# Altium PCB GPSR_v3.PcbDoc (part 2 of 2)
Units mil, origin at the board's own origin, x right, y up, seen from the top; angles counter-clockwise.
Board outline 2716.54 x 2700.39 mil, 4 copper layers (Top, GND2, VCC3, Bottom), stack 30.8 mil thick; 185 components, 126 nets, 538 pads, 295 vias.
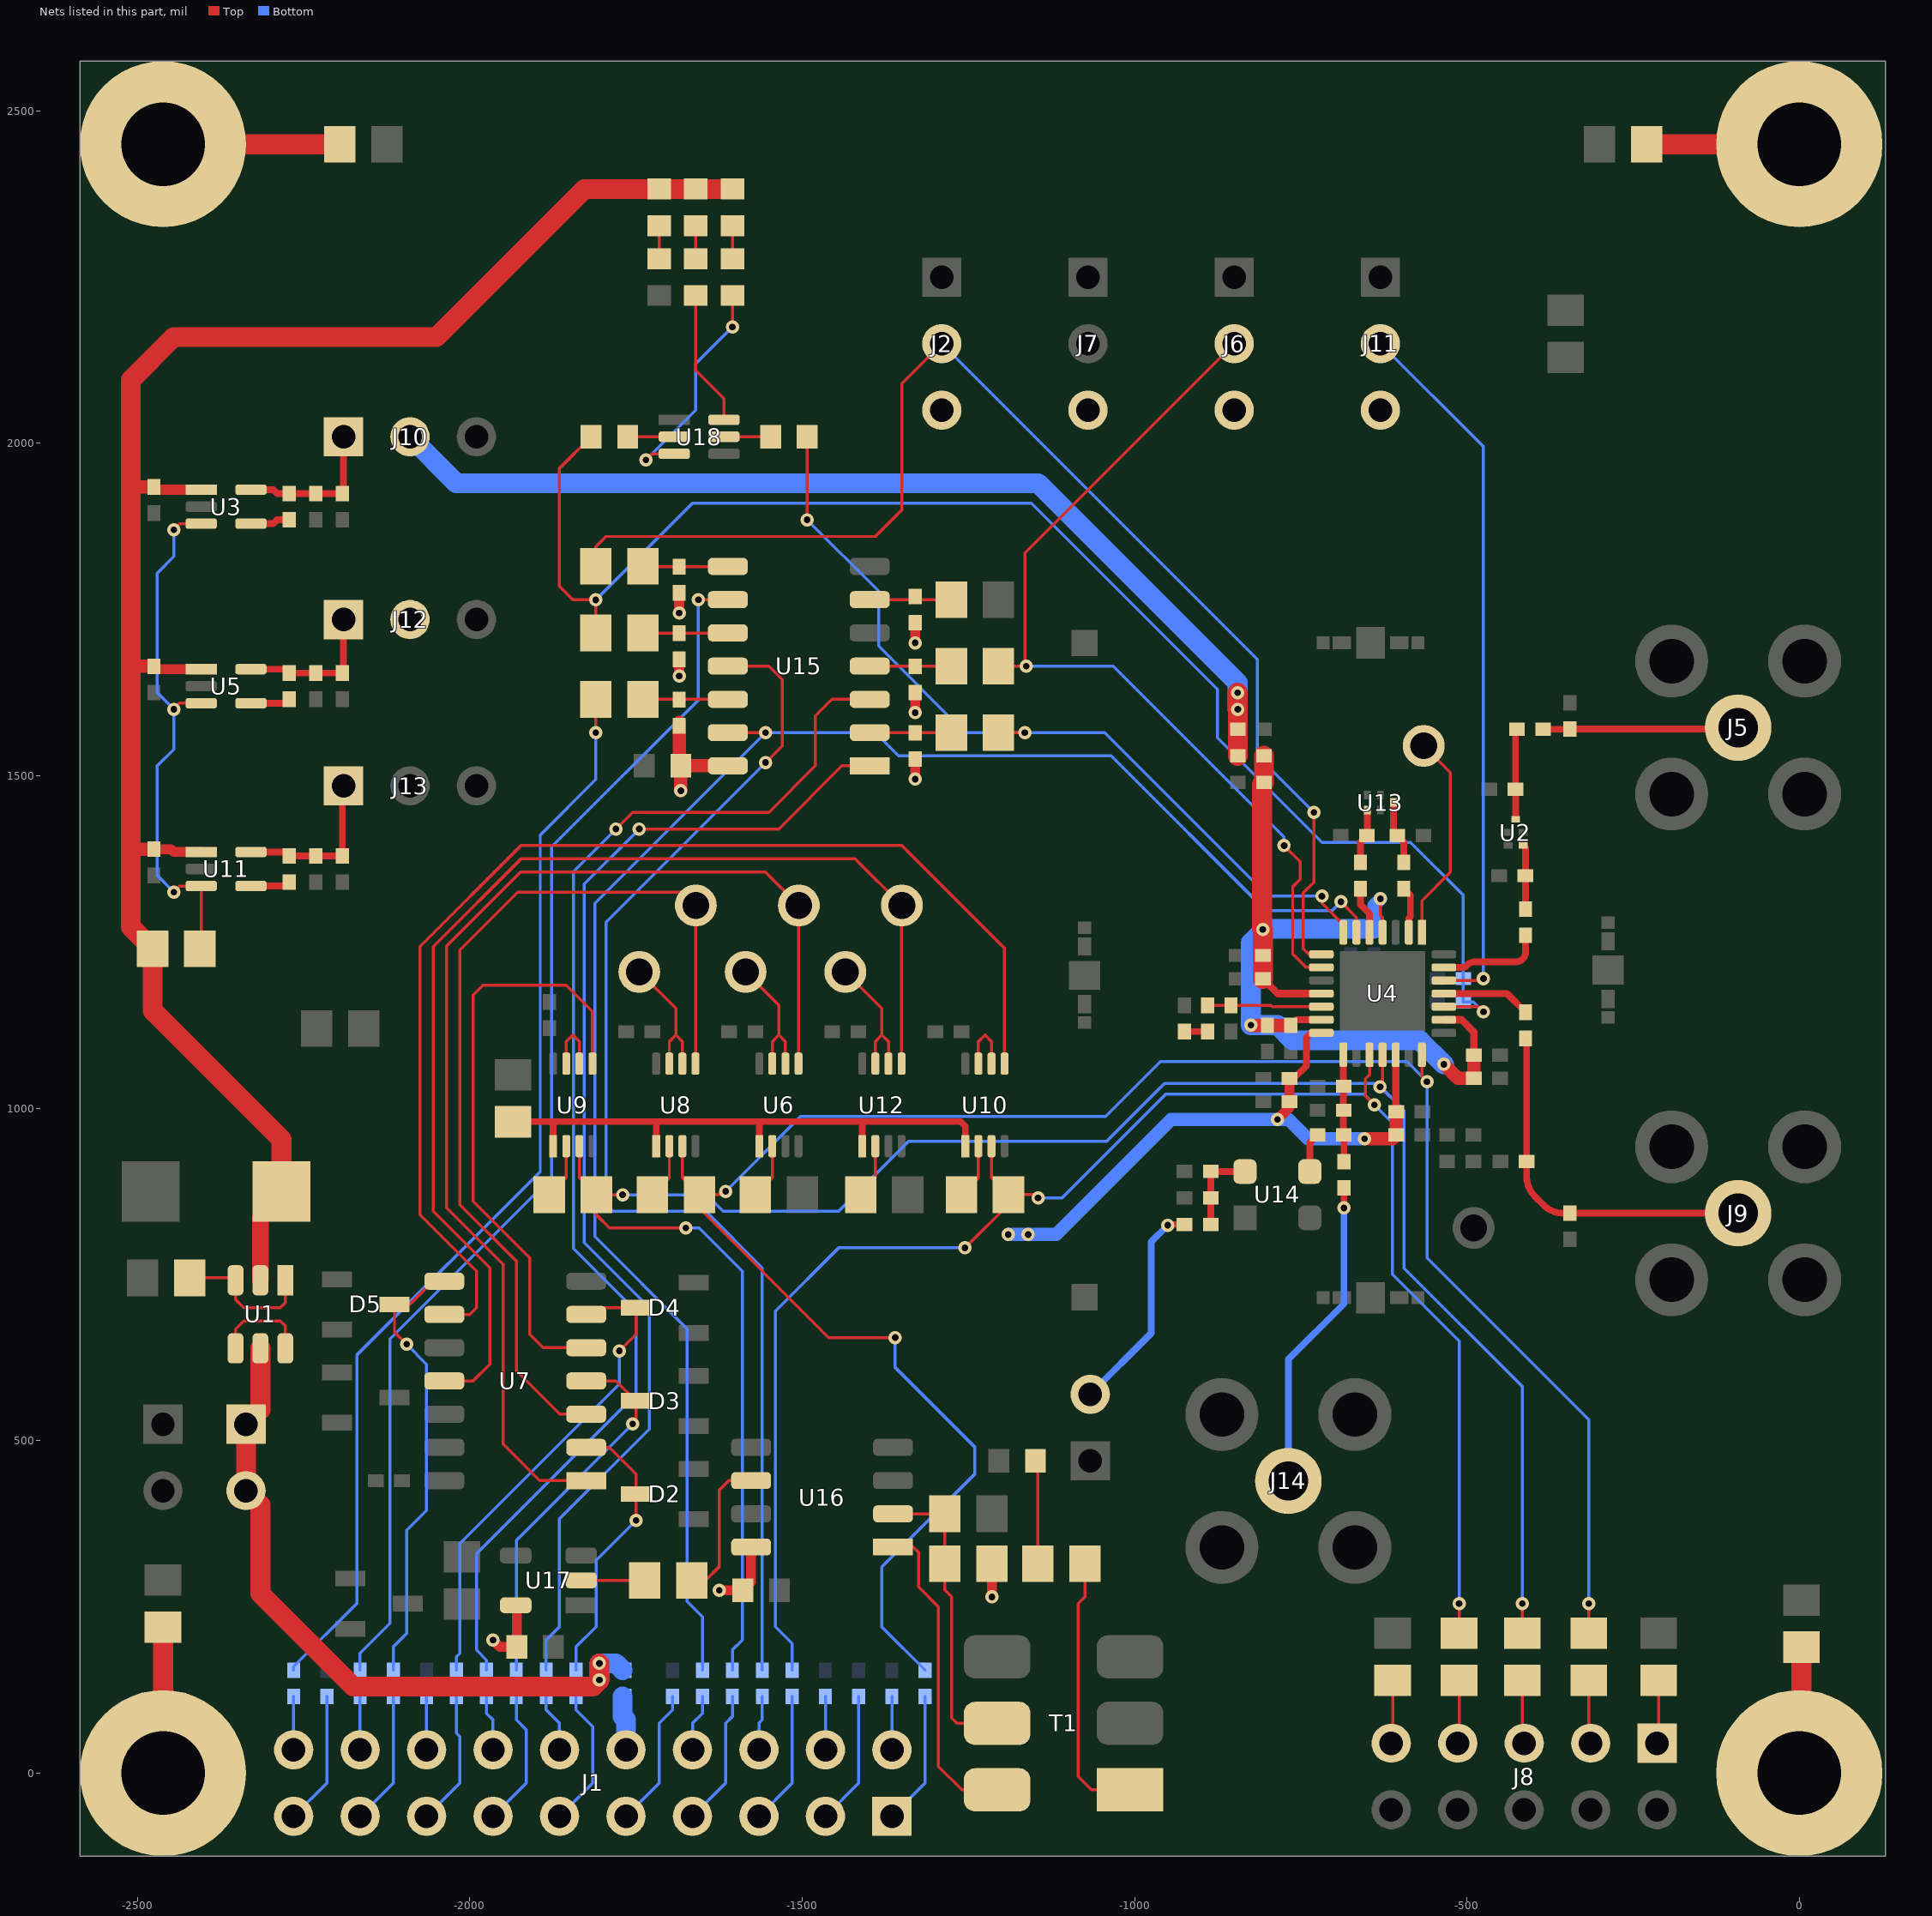
[diagram p4: the nets of this part, all layers, seen from the top]

## Via types
v1: diameter 20, hole 10, Top to Bottom, tented both sides, 295 vias

## Nets (pads, with @x,y where several pads share a name; then routed paths per layer and width w, separated by ;. In a path a pad name is that pad's centre, name@x,y a point inside that pad or via, vN(x,y) a via of type N, cw(c..) or ccw(c..) an arc to the next point about the centre after c; other vN are vias at no path point) (continued)
I0_BUF: D2.1 FB12.2 U7.2 | length 424
  Top w4.5: U7.2@-1824.84,489.8 -1789.8,489.8 -1749.92,449.92 D2.1@-1749.92,419.8 v1(-1749.92,380.08)
  Bottom w4.5: FB12.2@-1840,154.69 -1840,190.01 -1810,220.01 -1810,320 v1(-1749.92,380.08)
I1: FB2.2 R7.1 R41.1 U4.21 U8.3 | length 3278
  Top w4.5: U8.3@-1680.16,942.99 -1680.16,895.59 R41.1@-1654.57,870 ; v1(-1615,875) -1620,870 R41.1@-1654.57,870 ; v1(-1360,655) -1460,655 -1654.57,849.57 R41.1@-1654.57,870 ; U4.21@-567.72,1080.31 -567.71,1047.71 v1(-560,1040) ; R7.1@-316.61,210.24 v1(-316.61,255)
  Bottom w4.5: v1(-1615,875) -1502.5,987.5 -1043.5,987.5 -961,1070 -590,1070 v1(-560,1040) -560,775 -316.61,531.61 v1(-316.61,255) ; v1(-1360,655) -1360,610 -1240,490 -1240,450 -1380,310 -1380,219.69 FB2.2@-1315,154.69
I1_BUF: D3.1 FB14.2 U7.4 | length 567
  Top w4.5: U7.4@-1824.84,589.8 -1779.92,589.8 D3.1@-1749.92,559.8 -1749.92,530.08 v1(-1755,525)
  Bottom w4.5: FB14.2@-1930,154.69 -1930,350 v1(-1755,525)
IDLE_B: C41.2 C42.2 R24.1 R33.1 U4.24 | length 2269.3
  Top w4.5: R33.1@-1817.56,2010 -1865,1962.56 -1865,1785 -1844.57,1764.57 v1(-1810.43,1764.57) R24.1@-1810.43,1715 ; U4.24@-534.65,1152.76 -482.76,1152.76 v1(-475,1145)
  Bottom w4.5: v1(-1810.43,1764.57) -1665,1910 -1155,1910 -875,1630 -875,1557 -718,1400 -585,1400 -505.31,1320.31 C42.2@-505.31,1195 C41.2@-505.31,1160 -490,1160 v1(-475,1145)
IDLE_B_IN: FB5.1 U15.11 | length 1869.5
  Top w4.5: U15.11@-1611.77,1665 -1550,1665 -1530,1645 -1530,1545 v1(-1555,1520)
  Bottom w4.5: FB5.1@-1560,154.69 -1560,760 -1645,845 -1785,845 -1795,855 -1795,1280 v1(-1555,1520)
IN+: T1.6 U16.1 | length 478.9
  Top w4.5: U16.1@-1363.23,340 -1333,340 -1325,332 -1325,280 -1295,250 -1295,10 -1259.8,-25.2 T1.6@-1206.61,-25.2
LD: FB7.1 U4.6 U15.13 | length 2678.4
  Top w4.5: U15.13@-1611.77,1565 v1(-1555,1565) ; v1(-689.5,1310.5) -666.14,1287.14 U4.6@-666.14,1264.57
  Bottom w4.5: FB7.1@-1650,154.69 -1650,235 -1673,258 -1673,668 -1812,807 -1812,1308 v1(-1555,1565) -1390,1565 -1355,1530 -1035,1530 -801.95,1296.95 -703.05,1296.95 v1(-689.5,1310.5)
LD_BUF: FB19.1 R25.1 | length 1648.6
  Top w4.5: v1(-1810.43,1565) R25.1@-1810.43,1615
  Bottom w4.5: FB19.1@-2265,154.69 -2265,160 -2170,255 -2170,628.62 -1894,904.62 -1894,1410.99 -1810.43,1494.56 v1(-1810.43,1565)
NETC2_1: C2.1 J5.1 L3.2 | length 294.4
  Top w10: C2.1@-385.32,1570 -345.31,1570 L3.2@-345,1570.31 -94.02,1570.31 J5.1@-91.89,1572.44
NETC2_2: C2.2 L1.1 U2.1 | length 136.6
  Top w10: U2.1@-426.61,1434.49 -426.61,1479.49 L1.1@-426.93,1479.8 -426.93,1567.76 C2.2@-424.69,1570
NETC3_2: C3.2 C4.2 J9.1 L4.2 | length 556.2
  Top w10: C4.2@-411.61,1105.12 -410.31,1103.81 L4.2@-410.31,920 -410.31,897.89 ccw(c-367.12,897.89) -397.66,867.35 -384.29,853.98 ccw(c-355.66,882.61) -355.66,842.12 C3.2@-345,842.12 J9.1@-91.89,842.12
NETC4_1: C4.1 U4.25 | length 134.6
  Top w10: U4.25@-534.65,1172.44 -439.57,1172.44 C4.1@-411.61,1144.49
NETC5_1: C5.1 U4.27 | length 159.2
  Top w4.5: -501.01,1214.01 -499.01,1216.01
  Top w10: U4.27@-534.65,1211.81 -506.29,1211.81 ccw(c-506.29,1219.29) -501.24,1213.77 ccw(c-506.29,1219.29) -501,1214 ; -499,1216 cw(c-489.34,1206.34) -489.34,1220 -426.61,1220 ccw(c-426.61,1235) -411.61,1235 C5.1@-411.61,1260.12
NETC5_2: C5.2 L2.1 U2.4 | length 97.2
  Top w10: U2.4@-415.3,1395.12 -411.93,1391.75 L2.1@-411.93,1349.8 -411.61,1349.49 C5.2@-411.61,1299.49
NETC7_1: C7.1 U3.4 | length 60
  Top w10: U3.4@-2329.21,1879.21 -2295.79,1879.21 -2289.88,1885.12 C7.1@-2271.61,1885.12
NETC7_2: C7.2 C8.2 C9.2 J10.1 U3.5 | length 226.2
  Top w10: U3.5@-2329.21,1930.39 -2295.39,1930.39 -2289.49,1924.49 C7.2@-2271.61,1924.49 C8.2@-2231.61,1924.49 C9.2@-2191.61,1924.49 -2190,1926.1 J10.1@-2190,2010
NETC10_2: C10.2 FB21.1 J10.2 | length 1533.5
  Top w30: v1(-845,1625) -845,1600.31 v1(-844.69,1600) C10.2@-844.69,1570 FB21.1@-844.69,1530
  Bottom w30: J10.2@-2090,2010 -2020,1940 -1145,1940 -845,1640 v1(-845,1625) -845,1600.31 v1(-844.69,1600)
NETC12_1: C12.1 L5.1 U13.1 | length 96.7
  Top w10: U13.1@-610.32,1460 -610.32,1415.63 C12.1@-604.69,1410 -595,1400.32 L5.1@-595,1369.69
NETC14_1: C14.1 U5.4 | length 60
  Top w10: U5.4@-2329.21,1609.21 -2277.52,1609.21 C14.1@-2271.61,1615.12
NETC14_2: C14.2 C15.2 C16.2 J12.1 U5.5 | length 221.2
  Top w10: U5.5@-2329.21,1660.39 -2277.51,1660.39 C14.2@-2271.61,1654.49 C15.2@-2231.61,1654.49 C16.2@-2191.61,1654.49 -2190,1656.1 J12.1@-2190,1735
NETC18_1: C18.1 U11.4 | length 60
  Top w10: U11.4@-2329.21,1334.21 -2277.52,1334.21 C18.1@-2271.61,1340.12
NETC18_2: C18.2 C19.2 C20.2 J13.1 U11.5 | length 246.2
  Top w10: U11.5@-2329.21,1385.39 -2277.51,1385.39 C18.2@-2271.61,1379.49 C19.2@-2231.61,1379.49 C20.2@-2191.61,1379.49 -2191.61,1483.39 J13.1@-2190,1485
NETC21_1: C21.1 L6.1 U13.4 | length 83.3
  Top w10: L6.1@-660,1369.69 -660,1400.32 C21.1@-650.32,1410 -649.69,1410.63 U13.4@-649.69,1448.68
NETC22_1: C22.1 C23.1 C54.2 R45.2 U4.15 | length 161
  Top w10: U4.15@-685.83,1080.31 -685.83,960.51 C23.1@-685.32,960 -685,959.68 C22.1@-685,919.69
NETC22_2: C22.2 J14.1 | length 475.5
  Top w10: v1(-685,850) C22.2@-685,880.31
  Bottom w10: J14.1@-768.5,439.37 -768.5,622.5 -685,706 v1(-685,850)
NETC23_2: C23.2 U14.3 | length 59.9
  Top w10: U14.3@-736.18,904.84 -736.18,948.5 C23.2@-724.69,960
NETC24_2: C24.2 C25.2 R12.1 U14.4 | length 131.6
  Top w10: R12.1@-885.32,825 C24.2@-885.31,865 C25.2@-885.31,905 -885.16,904.84 U14.4@-833.82,904.84
NETC26_2: C26.2 R11.1 | length 35
  Top w10: C26.2@-925,1115.31 R11.1@-890,1115.32
NETC27_2: C27.2 R11.2 U4.12 | length 171.9
  Top w4.5: R11.2@-890,1154.69 C27.2@-855,1154.69 -794.68,1154.69 -792.75,1152.76 U4.12@-718.9,1152.76
NETC47_2: C47.2 R29.1 | length 156.3
  Top w4.5: C47.2@-1149.06,469.8 -1145.43,466.18 R29.1@-1145.43,315
NETD1_1: D1.1 R2.2 | length 49.9
  Top w4.5: D1.1@-1715,2277.56 R2.2@-1715,2327.44
NETD8_1: D8.1 R31.1 | length 49.9
  Top w4.5: D8.1@-1660,2277.56 R31.1@-1660,2327.44
NETD8_2: D8.2 U18.6 | length 204.4
  Top w4.5: D8.2@-1660,2222.44 -1660,2110 -1617.6,2067.6 U18.6@-1617.6,2035.59
NETD9_1: D9.1 R32.1 | length 49.9
  Top w4.5: D9.1@-1605,2277.56 R32.1@-1605,2327.44
NETD9_2: D9.2 U18.3 | length 347.8
  Top w4.5: v1(-1735,1975) -1725.59,1984.41 U18.3@-1692.4,1984.41 ; v1(-1605,2175) D9.2@-1605,2222.44
  Bottom w4.5: v1(-1735,1975) -1660,2050 -1660,2120 v1(-1605,2175)
NETFB1_2: FB1.2 J1.2 | length 80.3
  Bottom w4.5: FB1.2@-1365,115.31 -1365,35.08 J1.2@-1364.96,35.04
NETFB2_1: FB2.1 J1.1 | length 201
  Bottom w4.5: J1.1@-1364.96,-64.96 -1315,-15 FB2.1@-1315,115.32
NETFB3_2: FB3.2 J1.4 | length 80.3
  Bottom w4.5: FB3.2@-1465,115.31 -1465,35.08 J1.4@-1464.96,35.04
NETFB4_1: FB4.1 J1.3 | length 201
  Bottom w4.5: J1.3@-1464.96,-64.96 -1415,-15 FB4.1@-1415,115.32
NETFB5_2: FB5.2 J1.6 | length 82.4
  Bottom w4.5: J1.6@-1564.96,35.04 -1565,35.08 -1565,75 -1560,80 FB5.2@-1560,115.31
NETFB6_1: FB6.1 J1.5 | length 201
  Bottom w4.5: J1.5@-1564.96,-64.96 -1515,-15 FB6.1@-1515,115.32
NETFB7_2: FB7.2 J1.8 | length 86.5
  Bottom w4.5: J1.8@-1664.96,35.04 -1664.96,75.04 -1650,90 FB7.2@-1650,115.31
NETFB8_1: FB8.1 J1.7 | length 205.1
  Bottom w4.5: J1.7@-1664.96,-64.96 -1615,-15 -1615,75 -1605,85 FB8.1@-1605,115.32
NETFB9_2: FB9.2 J1.10 | length 82.4
  Bottom w30: FB9.2@-1770,115.31 -1770,85 -1764.96,79.96 J1.10@-1764.96,35.04
NETFB10_1: FB10.1 J1.9 | length 209.3
  Bottom w4.5: J1.9@-1764.96,-64.96 -1715,-15 -1715,75 -1695,95 FB10.1@-1695,115.32
NETFB11_2: FB11.2 J1.12 | length 88.6
  Bottom w4.5: FB11.2@-1885,115.31 -1885,94.99 -1865,74.99 -1865,35.08 J1.12@-1864.96,35.04
NETFB12_1: FB12.1 J1.11 | length 211.3
  Bottom w4.5: J1.11@-1864.96,-64.96 -1815,-15 -1815,70 -1840,95 FB12.1@-1840,115.32
NETFB13_2: FB13.2 J1.14 | length 84.4
  Bottom w4.5: FB13.2@-1975,115.31 -1975,90 -1965,80 -1965,35.08 J1.14@-1964.96,35.04
NETFB14_1: FB14.1 J1.13 | length 207.2
  Bottom w4.5: J1.13@-1964.96,-64.96 -1915,-15 -1915,65 -1930,80 FB14.1@-1930,115.32
NETFB15_2: FB15.2 J1.16 | length 80.3
  Bottom w4.5: FB15.2@-2065,115.31 -2065,35.08 J1.16@-2064.96,35.04
NETFB16_1: FB16.1 J1.15 | length 203
  Bottom w4.5: J1.15@-2064.96,-64.96 -2015,-15 -2015,55 -2020,60 FB16.1@-2020,115.32
NETFB17_2: FB17.2 J1.18 | length 80.3
  Bottom w4.5: FB17.2@-2165,115.31 -2165,35.08 J1.18@-2164.96,35.04
NETFB18_1: FB18.1 J1.17 | length 201
  Bottom w4.5: J1.17@-2164.96,-64.96 -2115,-15 FB18.1@-2115,115.32
NETFB19_2: FB19.2 J1.20 | length 80.3
  Bottom w4.5: FB19.2@-2265,115.31 -2265,35.08 J1.20@-2264.96,35.04
NETFB20_1: FB20.1 J1.19 | length 201
  Bottom w4.5: J1.19@-2264.96,-64.96 -2215,-15 FB20.1@-2215,115.32
NETJ8_1: J8.1 R6.2 | length 95.4
  Top w4.5: J8.1@-213.78,44.88 -211.61,47.05 R6.2@-211.61,139.37
NETJ8_3: J8.3 R7.2 | length 95.7
  Top w4.5: R7.2@-316.61,139.37 -316.61,47.71 J8.3@-313.78,44.88
NETJ8_5: J8.5 R8.2 | length 95.7
  Top w4.5: R8.2@-416.61,139.37 -416.61,47.71 J8.5@-413.78,44.88
NETJ8_7: J8.7 R9.2 | length 95.4
  Top w4.5: J8.7@-513.78,44.88 -511.61,47.05 R9.2@-511.61,139.37
NETJ8_9: J8.9 R10.2 | length 95.4
  Top w4.5: J8.9@-613.78,44.88 -611.61,47.05 R10.2@-611.61,139.37
NETJ15_2: J15.2 R12.2 | length 328.2
  Top w10: v1(-950,824) -949,825 R12.2@-924.69,825
  Bottom w10: J15.2@-1066.61,569.8 -974.89,661.52 -974.89,799.11 v1(-950,824)
NETL5_2: L5.2 U4.2 | length 70.9
  Top w10: L5.2@-595,1330.31 -585,1320.32 -585,1288 -587.4,1285.6 U4.2@-587.4,1264.57
NETL6_2: L6.2 U4.5 | length 71.4
  Top w10: L6.2@-660,1330.31 -660,1306 -646.46,1292.46 U4.5@-646.46,1264.57
NETMH1_1: MH1.1 R36.1 | length 190.8
  Top w30: MH1.1@0,0 3.39,3.39 R36.1@3.39,189.37
NETMH2_1: MH2.1 R37.1 | length 219.4
  Top w30: R37.1@-2461.61,219.37 -2461.42,219.18 MH2.1@-2461.42,0
NETMH3_1: MH3.1 R38.1 | length 229.6
  Top w30: R38.1@-229.57,2450 MH3.1@0,2450
NETMH4_1: MH4.1 R39.1 | length 266
  Top w30: MH4.1@-2461.42,2450 R39.1@-2195.43,2450
NETR4_2: R4.2 U1.1 U1.3 | length 215.8
  Top w4.5: R4.2@-2421.18,744.8 U1.3@-2356.02,744.8 ; U1.3@-2352.4,741.18 -2352.4,712.4 -2349.3,709.3 -2343.1,703.1 -2340,700 -2285,700 -2277.6,707.4 U1.1@-2277.6,741.18
  Top w10: U1.3@-2356.02,744.8 U1.3@-2352.4,741.18
NETR5_1: R5.1 U3.3 U5.3 U11.3 | length 818.3
  Top w4.5: v1(-2445,1325) -2445,1326.21 -2437,1334.21 U11.3@-2404.02,1334.21 R5.1@-2404.01,1241.97 ; v1(-2445,1600) -2445,1601.21 -2437,1609.21 U5.3@-2404.02,1609.21 ; v1(-2445,1870) -2445,1871.21 -2437,1879.21 U3.3@-2404.02,1879.21
  Top w10: R5.1@-2406.18,1239.8 R5.1@-2404.01,1241.97
  Bottom w4.5: v1(-2445,1325) -2470,1350 -2470,1515 -2445,1540 v1(-2445,1600) -2470,1625 -2470,1805 -2445,1830 v1(-2445,1870)
NETR14_1: R14.1 R25.2 U15.12 | length 128.1
  Top w4.5: R25.2@-1739.57,1615 -1685.32,1615 R14.1@-1685,1614.69 -1684.68,1615 U15.12@-1611.77,1615
NETR15_1: R15.1 R24.2 U15.10 | length 128.1
  Top w4.5: R24.2@-1739.57,1715 -1739.25,1714.68 R15.1@-1685,1714.69 -1612.09,1714.68 U15.10@-1611.77,1715
NETR16_1: R16.1 R23.2 U15.8 | length 128.1
  Top w4.5: R23.2@-1739.57,1815 -1739.25,1814.68 R16.1@-1685,1814.69 -1612.09,1814.68 U15.8@-1611.77,1815
NETR17_1: R17.1 R22.2 U15.6 | length 123.1
  Top w4.5: U15.6@-1398.23,1765 -1330.32,1765 -1330,1764.68 -1275.75,1764.68 R22.2@-1275.43,1765
NETR18_1: R18.1 R21.2 U15.4 | length 123.1
  Top w4.5: U15.4@-1398.23,1665 -1330.32,1665 R18.1@-1330,1664.69 -1329.68,1665 R21.2@-1275.43,1665
NETR19_1: R19.1 R20.2 U15.2 | length 123.1
  Top w4.5: U15.2@-1398.23,1565 -1330.32,1565 R19.1@-1330,1564.69 -1329.68,1565 R20.2@-1275.43,1565
NETR26_1: R26.1 R30.2 T1.5 U16.2 | length 461
  Top w4.5: U16.2@-1363.23,390 R30.2@-1285.43,390 R26.1@-1285.43,315 -1285.43,275.44 -1275,265.01 -1275,82.8 -1267,74.8 T1.5@-1206.61,74.8
NETR27_1: R27.1 U17.2 | length 95.4
  Top w4.5: U17.2@-1832.4,289.8 R27.1@-1737.05,289.8
NETR27_2: R27.2 U16.6 | length 219
  Top w4.5: R27.2@-1666.18,289.8 -1645.2,289.8 -1625,310 -1625,425 -1610.2,439.8 -1588.38,439.8 -1588.18,440 U16.6@-1576.77,440
NETR29_2: R29.2 T1.1 | length 411.1
  Top w4.5: R29.2@-1074.57,315 -1074.57,265.44 -1085,255.01 -1085,-5.01 -1064.81,-25.2 T1.1@-1006.61,-25.2
NETR33_2: R33.2 U18.2 | length 70
  Top w4.5: R33.2@-1762.44,2010 U18.2@-1692.4,2010
NETR34_2: R34.2 U18.5 | length 70
  Top w4.5: U18.5@-1617.6,2010 R34.2@-1547.56,2010
NETR35_1: R35.1 U6.1 U8.1 U9.1 U10.1 U12.1 | length 864.4
  Top w10: R35.1@-1935,979.57 -1934.57,980 -1880,980 ; U9.1@-1874.53,942.99 -1874.53,974.53 -1880,980 ; U8.1@-1719.53,942.99 -1719.53,979.53 -1720,980 ; U6.1@-1564.53,942.99 -1564.53,979.53 -1565,980 ; U12.1@-1409.53,942.99 -1409.53,979.53 -1410,980 ; U10.1@-1254.53,942.99 -1254.53,972.92 -1261.61,980 -1410,980 ; -1880,980 -1720,980 ; -1720,980 -1565,980 ; -1565,980 -1410,980
NETR40_2: R40.2 U6.2 | length 83.6
  Top w4.5: R40.2@-1570.43,870 -1544.84,895.59 U6.2@-1544.84,942.99
NETR41_2: R41.2 U8.2 | length 83.6
  Top w4.5: R41.2@-1725.43,870 -1699.84,895.59 U8.2@-1699.84,942.99
NETR42_2: R42.2 U9.2 | length 83.6
  Top w4.5: R42.2@-1880.43,870 -1854.84,895.59 U9.2@-1854.84,942.99
NETR43_2: R43.2 U10.2 | length 83.6
  Top w4.5: R43.2@-1260.43,870 -1234.84,895.59 U10.2@-1234.84,942.99
NETR44_2: R44.2 U12.2 | length 83.6
  Top w4.5: R44.2@-1415.43,870 -1389.84,895.59 U12.2@-1389.84,942.99
NETTP1_1: TP1.1 U4.1 | length 314.7
  Top w4.5: U4.1@-567.72,1264.57 -567.71,1312.29 -525,1355 -525,1505 TP1.1@-565,1545
NETTP3_1: TP3.1 U6.6 U6.7 | length 209.8
  Top w4.5: TP3.1@-1585,1205 -1535,1155 -1535,1110 ; U6.7@-1544.84,1067.01 -1544.84,1100.16 -1535,1110 ; U6.6@-1525.16,1067.01 -1525.16,1100.16 -1535,1110
NETTP4_1: TP4.1 U8.6 U8.7 | length 211.9
  Top w4.5: TP4.1@-1745,1205 -1690,1150 -1690,1110 ; U8.7@-1699.84,1067.01 -1699.84,1100.16 -1690,1110 ; U8.6@-1680.16,1067.01 -1680.16,1100.16 -1690,1110
NETTP5_1: TP5.1 U6.5 U7.1 | length 1766.7
  Top w4.5: U7.1@-1824.84,439.8 -1894.8,439.8 -1950,495 -1950,765 -2035,850 -2035,1244 -1924,1355 -1555,1355 -1505.47,1305.47 U6.5@-1505.47,1067.01
NETTP6_1: TP6.1 U7.3 U8.5 | length 1437.5
  Top w4.5: U7.3@-1824.84,539.8 -1864.8,539.8 -1930,605 -1930,770 -2015,855 -2015,1238 -1928,1325 -1680,1325 -1660.47,1305.47 U8.5@-1660.47,1067.01
NETTP7_1: TP7.1 U12.6 U12.7 | length 211.9
  Top w4.5: TP7.1@-1435,1205 -1380,1150 -1380,1110 ; U12.7@-1389.84,1067.01 -1389.84,1100.16 -1380,1110 ; U12.6@-1370.16,1067.01 -1370.16,1100.16 -1380,1110
NETTP8_1: TP8.1 U7.11 U12.5 | length 1768.5
  Top w4.5: U7.11@-2038.39,589.8 -1995.2,589.8 -1970,615 -1970,760 -2055,845 -2055,1243 -1923,1375 -1420,1375 -1350.47,1305.47 U12.5@-1350.47,1067.01
NETU1_4: U1.4 U1.6 | length 145.6
  Top w4.5: U1.4@-2352.4,638.82 -2352.4,667.6 -2340,680 -2285,680 -2277.6,672.6 U1.6@-2277.6,638.82
NETU7_5: U7.5 U9.5 | length 919.3
  Top w4.5: U7.5@-1824.84,639.8 -1889.8,639.8 -1910,660 -1910,775 -1995,860 -1995,1170 -1980,1185 -1854.99,1185 -1815.47,1145.48 U9.5@-1815.47,1067.01
NETU7_9: U7.9 U10.5 | length 1810.8
  Top w4.5: U7.9@-2038.39,689.8 -2000.2,689.8 -1990,700 -1990,755 -2075,840 -2075,1243 -1923,1395 -1350,1395 -1195.47,1240.47 U10.5@-1195.47,1067.01
NETU9_6: U9.6 U9.7 | length 94.1
  Top w4.5: U9.7@-1854.84,1067.01 -1854.84,1100.16 -1845,1110 -1835.16,1100.16 U9.6@-1835.16,1067.01
NETU10_6: U10.6 U10.7 | length 94.1
  Top w4.5: U10.7@-1234.84,1067.01 -1234.84,1100.16 -1225,1110 -1215.16,1100.16 U10.6@-1215.16,1067.01
PGM: J11.2 U4.26 | length 1080
  Top w4.5: U4.26@-534.65,1192.13 -477.88,1192.12 v1(-475,1195)
  Bottom w4.5: J11.2@-630,2150 -475,1995 v1(-475,1195)
Q0: FB8.2 R8.1 R42.1 U4.18 U9.3 | length 3209.4
  Top w4.5: U9.3@-1835.16,942.99 -1835.16,895.59 R42.1@-1809.57,870 ; v1(-1770,869.8) -1809.77,869.8 R42.1@-1809.57,870 ; v1(-1675,820) -1790,820 -1809.57,839.57 R42.1@-1809.57,870 ; v1(-630.5,1032) -630,1032 -629,1031 -629,1038 -626.77,1040.23 U4.18@-626.77,1080.31 ; R8.1@-416.61,210.24 v1(-416.61,255)
  Bottom w4.5: v1(-1770,869.8) -1643.8,869.8 -1619,845 -1445,845 -1340,950 -1042,950 -955,1037 -635,1037 -594.47,996.47 -594.47,759.47 -416.61,581.61 v1(-416.61,255) ; v1(-1675,820) -1655,820 -1590,755 -1590,200.01 -1605,185.01 FB8.2@-1605,154.69
Q0_BUF: D4.1 FB16.2 U7.6 | length 736
  Top w4.5: U7.6@-1824.84,689.8 -1814.84,699.8 D4.1@-1749.92,699.8 -1749.92,660.08 v1(-1775,635)
  Bottom w4.5: FB16.2@-2020,154.69 -2020,175 -2015,180 -2015,345 -1775,585 v1(-1775,635)
Q1: FB6.2 R9.1 R43.1 U4.17 U10.3 | length 2620.5
  Top w4.5: v1(-1255,790) -1189.57,855.43 R43.1@-1189.57,870 ; U10.3@-1215.16,942.99 -1215.16,895.59 R43.1@-1189.57,870 ; v1(-1145,865) -1150,870 R43.1@-1189.57,870 ; U4.17@-646.46,1080.31 -646.45,1050.55 -652.5,1044.5 -652.5,1018.5 v1(-639,1005) ; R9.1@-511.61,210.24 v1(-511.61,255)
  Bottom w4.5: FB6.2@-1515,154.69 -1515,195.01 -1540,220.01 -1540,695 -1445,790 v1(-1255,790) ; v1(-1145,865) -1109,865 -953,1021 -655,1021 v1(-639,1005) -612.02,978.02 -612.02,750.02 -511.61,649.61 v1(-511.61,255)
Q1_BUF: D5.1 FB18.2 U7.8 | length 680.2
  Top w4.5: v1(-2095,645) -2113.3,663.3 D5.1@-2113.31,704.8 -2090.2,704.8 -2055.2,739.8 U7.8@-2038.39,739.8
  Bottom w4.5: FB18.2@-2115,154.69 -2115,190.01 -2095,210.01 -2095,365 -2065,395 -2065,615 v1(-2095,645)
SCLK: J6.2 R21.1 U4.9 | length 1394.6
  Top w4.5: R21.1@-1204.57,1665 v1(-1163,1665) -1165,1667 -1165,1835 -950,2050 J6.2@-850,2150 ; v1(-775,1395) -750.66,1370.66 -750.66,1344.34 -762,1333 -762,1232 -741.81,1211.81 U4.9@-718.9,1211.81
  Bottom w4.5: v1(-1163,1665) -1032,1665 -775,1408 v1(-775,1395)
SCLK_IN: FB13.1 U15.3 | length 1942.8
  Top w4.5: v1(-1780,1420) -1755,1445 -1550,1445 -1480,1515 -1480,1590 -1455,1615 U15.3@-1398.23,1615
  Bottom w4.5: FB13.1@-1975,154.69 -1975,170 -1990,185 -1990,330 -1750,570 -1750,695 -1843.89,788.89 -1843.89,1356.11 v1(-1780,1420)
SDATA: J2.2 R23.1 U4.8 | length 1967
  Top w4.5: R23.1@-1810.43,1815 -1810.43,1844.57 -1795,1860 -1390,1860 -1350,1900 -1350,2090 J2.2@-1290,2150 ; v1(-730,1445) -730,1340 -746,1324 -746,1240 -737.5,1231.5 U4.8@-718.9,1231.5
  Bottom w4.5: J2.2@-1290,2150 -815,1675 -815,1530 v1(-730,1445)
SDATA_IN: FB17.1 U15.9 | length 1865.4
  Top w4.5: v1(-1656,1765) U15.9@-1611.77,1765
  Bottom w4.5: FB17.1@-2165,154.69 -2165,180 -2120,225 -2120,653 -1876.73,896.27 -1876.73,1393.27 -1656,1614 v1(-1656,1765)
SHDN_B: R20.1 R34.1 U4.7 | length 1289.6
  Top w4.5: v1(-1492.44,1885) R34.1@-1492.44,2010 ; R20.1@-1204.57,1565 v1(-1165,1565) ; v1(-718,1319) -718,1308 -685.83,1275.83 U4.7@-685.83,1264.57
  Bottom w4.5: v1(-1492.44,1885) -1385,1777.56 -1385,1694.99 -1255.01,1565 v1(-1165,1565) -1045.01,1565 -799.01,1319 v1(-718,1319)
SHDN_B_IN: FB11.1 U15.1 | length 1790.6
  Top w4.5: v1(-1745,1420) -1535,1420 -1440,1515 U15.1@-1398.23,1515
  Bottom w4.5: FB11.1@-1885,154.69 -1885,200 -1865,220 -1865,382.38 -1730,517.38 -1730,700 -1828,798 -1828,1337 v1(-1745,1420)
VCC: C1.1 C6.2 C13.2 C17.2 R2.1 R5.2 R31.2 R32.2 U1.2 U3.1 U5.1 U11.1 | length 2808.8
  Top w15: C17.2@-2475,1389.69 -2449.68,1389.69 -2445.38,1385.39 U11.1@-2404.02,1385.39 ; C13.2@-2475,1664.69 -2470.7,1660.39 U5.1@-2404.02,1660.39 ; C6.2@-2475,1934.69 -2470.7,1930.39 U3.1@-2404.02,1930.39
  Top w20: -2510,1390 -2509.69,1389.69 C17.2@-2475,1389.69 ; -2510,1665 -2509.69,1664.69 C13.2@-2475,1664.69 ; -2510,1935 -2509.69,1934.69 C6.2@-2475,1934.69
  Top w25: U1.2@-2315,741.18 -2315,835 -2283.18,866.82 C1.1@-2283.19,874.8
  Top w30: C1.1@-2283.19,874.8 -2283.18,953.18 -2477.04,1147.04 R5.2@-2477.05,1239.8 -2510,1272.76 -2510,1390 -2510,1665 -2510,1935 -2510,2095 -2445,2160 -2050,2160 -1827.44,2382.56 R2.1@-1715,2382.56 R31.2@-1660,2382.56 R32.2@-1605,2382.56
VCC_ADC: C36.1 C37.2 C38.2 C39.2 C40.2 C45.2 C46.2 J2.3 J6.3 J7.3 J11.3 J12.2 R14.2 R15.2 R16.2 R17.2 R18.2 R19.2 R26.2 U4.14 U4.19 U15.14 U16.8 U17.5 | length 1541.8
  Top w10: C37.2@-766.93,1044.8 -760.2,1044.8 -741.29,1063.71 -741.29,1106.71 -734.62,1113.38 U4.14@-718.9,1113.39
  Top w11: U4.19@-607.09,1080.31 -607.09,995.59 C39.2@-606.3,994.8
  Top w15: v1(-1965,200) -1954.8,189.8 C46.2@-1929.17,189.8 -1929.17,250.75 U17.5@-1930.83,252.4 ; v1(-1685,1650) R15.2@-1685,1675.31 ; v1(-1685,1745) R16.2@-1685,1775.31 ; v1(-1624.8,274.8) C45.2@-1589.17,274.8 -1576.77,287.2 U16.8@-1576.77,340 ; v1(-1330,1495) R19.2@-1330,1525.31 ; v1(-1330,1595) R18.2@-1330,1625.31 ; v1(-1330,1700) R17.2@-1330,1730.31 ; v1(-1214.57,265) R26.2@-1214.57,315 ; v1(-785,983) -766.93,1001.07 C38.2@-766.93,1009.8 C37.2@-766.93,1044.8
  Top w20: R14.2@-1685,1580.31 -1685,1517.56 C36.1@-1682.44,1515 ; v1(-1682.44,1477.56) C36.1@-1682.44,1515 ; U15.14@-1611.77,1515 C36.1@-1682.44,1515 ; v1(-654,954) -612.1,954 C40.2@-606.3,959.8 C39.2@-606.3,994.8
  Bottom w20: v1(-1190,810) v1(-1160,810) -1118,810 -945,983 -767.92,983 -738.92,954 v1(-654,954)
VCC_CP: C11.2 C28.2 C29.2 C30.2 C31.2 C32.2 C33.2 C34.2 C35.2 FB21.2 U4.4 U4.11 U4.13 U4.23 | length 1454.4
  Top w4.5: v1(-630,1315) -630,1290 -626.77,1286.77 U4.4@-626.77,1264.57
  Top w10: C34.2@-765,1124.69 -756.62,1133.07 U4.13@-718.9,1133.07
  Top w11: C32.2@-806.93,1194.8 -784.56,1172.44 U4.11@-718.9,1172.44 ; U4.23@-534.65,1133.07 -508.07,1133.07 -489.69,1114.69 C28.2@-489.69,1080
  Top w20: v1(-825,1125) -824.69,1124.69 C34.2@-765,1124.69 ; v1(-534.5,1066) -513.5,1045 C29.2@-489.69,1045 C28.2@-489.69,1080
  Top w30: C32.2@-806.93,1194.8 -806.92,1268.92 v1(-807,1269) -808,1270 -808,1487.31 C11.2@-805.31,1490 FB21.2@-805.31,1530
  Bottom w20: C30.2@-640,1269.69 -640,1305 v1(-630,1315)
  Bottom w30: C30.2@-640,1269.69 -804.31,1269.69 -805,1269 v1(-807,1269) -807,1267 -825,1249 v1(-825,1125) -784.99,1125 -761.99,1102 -570.5,1102 v1(-534.5,1066)
VCC_IN: FB9.1 J3.1 J3.2 U1.5 | length 1048.1
  Top w30: U1.5@-2315,638.82 -2315,546.41 J3.1@-2336.61,524.8 J3.2@-2336.61,424.8 -2315,403.19 -2315,270 -2175,130 -1815,130 v1(-1805,140) v1(-1805,165)
  Bottom w30: v1(-1805,140) v1(-1805,165) -1780.32,165 FB9.1@-1770,154.68
pads on no net: T1.2 T1.4 U4.22 U4.28 U7.12 U14.1 U16.7 U17.1

## Polygon pours and split planes (outlines as drawn)
AGND on GND2 "GND2-AGND" (solid, remove dead copper, pour order 13): -1100,540.43 -1099.99,540.78 -1099.94,541.12 -1099.86,541.46 -1099.76,541.8 -1099.63,542.12 -1099.47,542.43 -1099.28,542.72 -1099.07,543 -1098.83,543.26 -1098.57,543.49 -1098.3,543.71 -1098,543.89 -1097.69,544.06 -1097.37,544.19 -1097.04,544.29 -1096.7,544.37 -1096.35,544.42 -1096,544.43 -1095.65,544.42 -1095.31,544.37 -1094.97,544.3 -1094.63,544.19 -1094.31,544.06 -1094,543.9 -1093.71,543.71 -1093.43,543.5 -1093.17,543.26 -1090.76,541.05 -1088.16,539.05 -1085.4,537.29 -1082.49,535.78 -1079.47,534.52 -1076.34,533.53 -1073.14,532.82 -1069.9,532.4 -1066.62,532.25 -1063.35,532.39 -1060.1,532.82 -1056.91,533.53 -1053.78,534.51 -1050.76,535.76 -1047.85,537.28 -1045.09,539.03 -1042.49,541.03 -1040.07,543.24 -1037.86,545.65 -1035.86,548.25 -1034.1,551.01 -1032.59,553.92 -1031.33,556.94 -1030.35,560.07 -1029.64,563.27 -1029.21,566.51 -1029.06,569.79 -1029.21,573.06 -1029.63,576.31 -1030.34,579.5 -1031.32,582.63 -1032.58,585.65 -1034.09,588.56 -1035.85,591.32 -1037.84,593.92 -1040.05,596.34 -1042.47,598.55 -1045.06,600.55 -1047.82,602.31 -1050.73,603.82 -1053.76,605.08 -1056.88,606.06 -1060.08,606.77 -1063.32,607.2 -1066.6,607.35 -1069.87,607.21 -1073.12,606.78 -1076.32,606.07 -1079.44,605.09 -1082.47,603.83 -1085.37,602.32 -1088.14,600.56 -1090.74,598.57 -1093.15,596.36 -1093.17,596.34 -1093.43,596.1 -1093.7,595.89 -1094,595.7 -1094.31,595.54 -1094.63,595.41 -1094.96,595.3 -1095.3,595.23 -1095.65,595.18 -1096,595.17 -1096.35,595.18 -1096.69,595.23 -1097.03,595.3 -1097.37,595.41 -1097.69,595.54 -1098,595.7 -1098.29,595.89 -1098.57,596.1 -1098.83,596.34 -1099.06,596.6 -1099.28,596.87 -1099.46,597.17 -1099.63,597.48 -1099.76,597.8 -1099.86,598.13 -1099.94,598.47 -1099.99,598.82 -1100,599.17 -1100,1795 -1095,1800 -430,1800 -425,1805 -425,2150 -420,2155 105,2155 110,2150 110,335 100,325 -135,325 -145,315 -145,-95 -155,-105 -1095,-105 -1100,-100 -1100,432.26 -1029.06,432.26 -1029.06,507.34 -1100,507.34 -1100,540.43
DGND on GND2 "GND2-DGND" (solid, remove dead copper, pour order 14): 1245 vertices, not listed, extent -2295,-105 -445,2320
GND on GND2 "GND2-GND" (solid, remove dead copper, pour order 17): -2560,265 -2565,270 -2565,2270 -2555,2280 -2250,2280 -2150,2380 -2150,2550 -2145,2555 -280,2555 -275,2550 -275,2180 -280,2175 -420,2175 -425,2180 -425,2330 -440,2345 -1355,2345 -1580,2120 -1885,2120 -1915,2090 -1915,1465 -2205,1175 -2205,285 -2215.3,274.7 -2215.56,274.46 -2215.84,274.25 -2216.13,274.06 -2216.44,273.9 -2216.76,273.77 -2217.09,273.67 -2217.44,273.59 -2217.78,273.54 -2218.13,273.53 -2218.48,273.54 -2218.82,273.59 -2219.17,273.67 -2219.5,273.77 -2219.82,273.91 -2220.13,274.07 -2220.42,274.25 -2220.7,274.47 -2220.96,274.7 -2221.19,274.96 -2221.41,275.24 -2221.59,275.53 -2221.75,275.84 -2221.89,276.16 -2221.99,276.5 -2222.07,276.84 -2222.1,277.07 -2222.35,278.62 -2222.73,280.15 -2223.25,281.63 -2223.89,283.07 -2224.65,284.44 -2225.54,285.74 -2226.53,286.96 -2227.62,288.09 -2228.81,289.12 -2230.08,290.04 -2231.43,290.85 -2232.85,291.54 -2234.31,292.1 -2235.83,292.53 -2237.37,292.82 -2238.93,292.99 -2240.51,293.01 -2242.07,292.9 -2243.63,292.65 -2245.15,292.27 -2246.64,291.75 -2248.07,291.11 -2249.45,290.34 -2250.75,289.46 -2251.97,288.47 -2253.1,287.38 -2254.12,286.19 -2255.05,284.92 -2255.85,283.57 -2256.54,282.15 -2257.1,280.68 -2257.53,279.17 -2257.83,277.63 -2257.99,276.06 -2258.01,274.49 -2257.9,272.92 -2257.65,271.37 -2257.34,270.09 -2257.26,269.75 -2257.21,269.4 -2257.19,269.06 -2257.2,268.71 -2257.24,268.36 -2257.31,268.02 -2257.41,267.69 -2257.54,267.36 -2257.7,267.05 -2257.88,266.75 -2258.09,266.47 -2258.32,266.21 -2258.57,265.97 -2258.85,265.76 -2259.14,265.56 -2259.45,265.4 -2259.77,265.26 -2260.1,265.15 -2260.44,265.07 -2260.78,265.02 -2261.13,265 -2261.19,265 -2560,265
AGND on VCC3 "VCC3-AGND" (solid, remove dead copper, pour order 12): -1100,540.43 -1099.99,540.78 -1099.94,541.12 -1099.86,541.46 -1099.76,541.8 -1099.63,542.12 -1099.47,542.43 -1099.28,542.72 -1099.07,543 -1098.83,543.26 -1098.57,543.49 -1098.3,543.71 -1098,543.89 -1097.69,544.06 -1097.37,544.19 -1097.04,544.29 -1096.7,544.37 -1096.35,544.42 -1096,544.43 -1095.65,544.42 -1095.31,544.37 -1094.97,544.3 -1094.63,544.19 -1094.31,544.06 -1094,543.9 -1093.71,543.71 -1093.43,543.5 -1093.17,543.26 -1090.76,541.05 -1088.16,539.05 -1085.4,537.29 -1082.49,535.78 -1079.47,534.52 -1076.34,533.53 -1073.14,532.82 -1069.9,532.4 -1066.62,532.25 -1063.35,532.39 -1060.1,532.82 -1056.91,533.53 -1053.78,534.51 -1050.76,535.76 -1047.85,537.28 -1045.09,539.03 -1042.49,541.03 -1040.07,543.24 -1037.86,545.65 -1035.86,548.25 -1034.1,551.01 -1032.59,553.92 -1031.33,556.94 -1030.35,560.07 -1029.64,563.27 -1029.21,566.51 -1029.06,569.79 -1029.21,573.06 -1029.63,576.31 -1030.34,579.5 -1031.32,582.63 -1032.58,585.65 -1034.09,588.56 -1035.85,591.32 -1037.84,593.92 -1040.05,596.34 -1042.47,598.55 -1045.06,600.55 -1047.82,602.31 -1050.73,603.82 -1053.76,605.08 -1056.88,606.06 -1060.08,606.77 -1063.32,607.2 -1066.6,607.35 -1069.87,607.21 -1073.12,606.78 -1076.32,606.07 -1079.44,605.09 -1082.47,603.83 -1085.37,602.32 -1088.14,600.56 -1090.74,598.57 -1093.15,596.36 -1093.17,596.34 -1093.43,596.1 -1093.7,595.89 -1094,595.7 -1094.31,595.54 -1094.63,595.41 -1094.96,595.3 -1095.3,595.23 -1095.65,595.18 -1096,595.17 -1096.35,595.18 -1096.69,595.23 -1097.03,595.3 -1097.37,595.41 -1097.69,595.54 -1098,595.7 -1098.29,595.89 -1098.57,596.1 -1098.83,596.34 -1099.06,596.6 -1099.28,596.87 -1099.46,597.17 -1099.63,597.48 -1099.76,597.8 -1099.86,598.13 -1099.94,598.47 -1099.99,598.82 -1100,599.17 -1100,1795 -1095,1800 -430,1800 -425,1805 -425,2150 -420,2155 105,2155 110,2150 110,335 100,325 -135,325 -145,315 -145,-95 -155,-105 -1095,-105 -1100,-100 -1100,432.26 -1029.06,432.26 -1029.06,507.34 -1100,507.34 -1100,540.43
VCC_ADC on VCC3 "VCC3-VCC_ADC" (solid, remove dead copper, pour order 20): 1247 vertices, not listed, extent -2565,-105 -445,2555
GND on Top "Top-No Net" (solid, remove dead copper, pour order 22): -700,2345 -440,2345 -425,2330 -425,2315 -425,2180 -420,2175 -405,2175 -280,2175 -275,2180 -275,2195 -275,2550 -280,2555 -300,2555 -2145,2555 -2150,2550 -2150,2540 -2150,2380 -2295,2235 -2310,2235 -2555,2235 -2565,2225 -2565,2215 -2565,275 -2555,265 -2530,265 -2225,265 -2205,285 -2205,330 -2205,1175 -1915,1465 -1915,1485 -1915,2090 -1885,2120 -1860,2120 -1580,2120 -1355,2345 -700,2345
DGND on Top "Top-No Net" (solid, remove dead copper, pour order 19): -970,1820 -925,1820 -455,1820 -445,1830 -445,1855 -445,2315 -450,2320 -465,2320 -1345,2320 -1565,2100 -1585,2100 -1875,2100 -1895,2080 -1895,2060 -1895,1460 -2185,1170 -2185,990 -2185,275 -2295,165 -2295,145 -2295,-100 -2290,-105 -2260,-105 -1125,-105 -1120,-100 -1120,-80 -1120,1805 -1105,1820 -975,1820
AGND on Top "Top-No Net" (solid, remove dead copper, pour order 16): -1100,365 -1100,350 -1100,-100 -1095,-105 -1070,-105 -175,-105 -165,-95 -165,-85 -165,295 -135,325 -120,325 100,325 110,335 110,360 110,2150 105,2155 95,2155 -420,2155 -425,2150 -425,2135 -425,1805 -430,1800 -445,1800 -1095,1800 -1100,1795 -1100,1785 -1100,390
DGND on Bottom "Top-No Net" (solid, remove dead copper, pour order 18): -970,1820 -925,1820 -455,1820 -445,1830 -445,1855 -445,2315 -450,2320 -465,2320 -1345,2320 -1565,2100 -1585,2100 -1875,2100 -1895,2080 -1895,2060 -1895,1460 -2185,1170 -2185,990 -2185,275 -2295,165 -2295,145 -2295,-100 -2290,-105 -2260,-105 -1125,-105 -1120,-100 -1120,-80 -1120,1805 -1105,1820 -975,1820
GND on Bottom "Top-No Net" (solid, remove dead copper, pour order 21): -700,2345 -440,2345 -425,2330 -425,2315 -425,2180 -420,2175 -405,2175 -280,2175 -275,2180 -275,2195 -275,2550 -280,2555 -300,2555 -2145,2555 -2150,2550 -2150,2540 -2150,2380 -2295,2235 -2310,2235 -2555,2235 -2565,2225 -2565,2215 -2565,275 -2555,265 -2530,265 -2225,265 -2205,285 -2205,330 -2205,1175 -1915,1465 -1915,1485 -1915,2090 -1885,2120 -1860,2120 -1580,2120 -1355,2345 -700,2345
AGND on Bottom "Top-No Net" (solid, remove dead copper, pour order 15): -1100,365 -1100,350 -1100,-100 -1095,-105 -1070,-105 -175,-105 -165,-95 -165,-85 -165,295 -135,325 -120,325 100,325 110,335 110,360 110,2150 105,2155 95,2155 -420,2155 -425,2150 -425,2135 -425,1805 -430,1800 -445,1800 -1095,1800 -1100,1795 -1100,1785 -1100,390

## Other copper
GND2:
  pour cut-out: -145,315 -168,292 -168,-96 -181,-109 -181,-116 -132,-116 -132,316
  pour cut-out: -2245,2285 -2297,2233 -2550,2233 -2565,2218 -2565,2270 -2550,2285
VCC3:
  pour cut-out: -145,315 -168,292 -168,-96 -181,-109 -181,-116 -132,-116 -132,316
  pour cut-out: -2245,2285 -2297,2233 -2550,2233 -2565,2218 -2565,2270 -2550,2285

## Silkscreen, mask and mechanical layers (free items; w line width, h text height)
Silkscreen Top:
  text "PWR" at -1530,2260 h30 r90
  text "IDLE_B" at -1485,2255 h30 r90
  text "SHDN_B" at -1440,2255 h30 r90
  text "On  /  Off" at -2225,2075 h30
  text "HI / LO" at -1175,2020 h40 r90
  text "HI / LO" at -960,2020 h40 r90
  text "HI / LO" at -735,2020 h40 r90
  text "HI / LO" at -520,2020 h40 r90
  text "GPSR FrontEnd" at -450,2000 h40
  text "2V85_A" at -2425,1975 h30
  text "SDATA" at -1345,1950 h30
  text "CS_B" at -1120,1950 h30
  text "SCLK" at -895,1950 h30
  text "PGM" at -665,1950 h30
  text "PCB REV 3" at -450,1930 h40
  text "2025/01" at -450,1860 h40
  text "On  /  Off" at -2220,1800 h30
  text "Passive" at -175,1785 h30
  text "2V85_D" at -2425,1700 h30
  text "On  /  Off" at -2225,1550 h30
  text "3V3" at -2335,1440 h30
  text "Active" at -175,605 h30
  text "TCXO_CLK" at -595,405 h30
  text "TCXO_PWR" at -965,400 h30 r90
  text "GND" at -2500,330 h30
  text "VCC" at -2375,330 h30
  text "LD" at -2290,90 h25
  text "SDA" at -2195,90 h25
  text "CS" at -2090,90 h25
  text "SCL" at -2000,90 h25
  text "SHDN" at -1910,90 h25
  text "VCC" at -1790,90 h25
  text "LD" at -1690,90 h25
  text "IDLE" at -1610,90 h25
  text "CLK" at -1495,90 h25
  text "CLK" at -1390,90 h25
Mechanical 1:
  the board outline again, w1
Mechanical 3:
  lines w3.94: -2586.61,-125.2 -2586.61,2575.2 129.92,2575.2 129.92,-125.2 -2586.61,-125.2
  lines w10: -2875,-125.2 -2636.61,-125.2 ; -2875,2575.2 -2636.61,2575.2 ; -2825,1157.5 -2825,-125.2 ; -2825,1292.5 -2825,2575.2 ; -2586.61,2625.2 -2586.61,2805 ; -1437.89,2755 -2586.61,2755 ; -1018.8,2755 129.92,2755 ; 129.92,2625.2 129.92,2805 ; -2825,-125.2 -2800,-25.2 -2850,-25.2 -2825,-125.2 ; -2825,2575.2 -2850,2475.2 -2800,2475.2 -2825,2575.2 ; -2586.61,2755 -2486.61,2730 -2486.61,2780 -2586.61,2755 ; 129.92,2755 29.92,2780 29.92,2730 129.92,2755
  text "69.00mm" at -1407.89,2717.5 h60
  text "68.59mm" at -3005.68,1187.5 h60
Drill Drawing:
  text ".Legend" at 481,-129 h25

## Text inside footprints (layer, text, board x,y; h text height)
J1: Silkscreen Bottom "20" at -2300,100 h25; Silkscreen Bottom "19" at -2325,-115 h22; Silkscreen Bottom "1" at -1264.96,-84.96 h25; Silkscreen Bottom "2" at -1264.96,15.04 h25
J8: Silkscreen Top "2" at -154,-70.87 h25; Silkscreen Top "1" at -150,44.88 h25; Silkscreen Top "9" at -695,30 h25; Silkscreen Top "10" at -715,-80 h25